# Altium PCB JTAGICE Convertor.PcbDoc
Units mm, origin at the board's own origin, x right, y up, seen from the top; angles counter-clockwise.
Board outline 41.3 x 28.3 mm, 2 copper layers (Top Layer, Bottom Layer); 6 components, 7 nets, 28 pads, 0 vias.
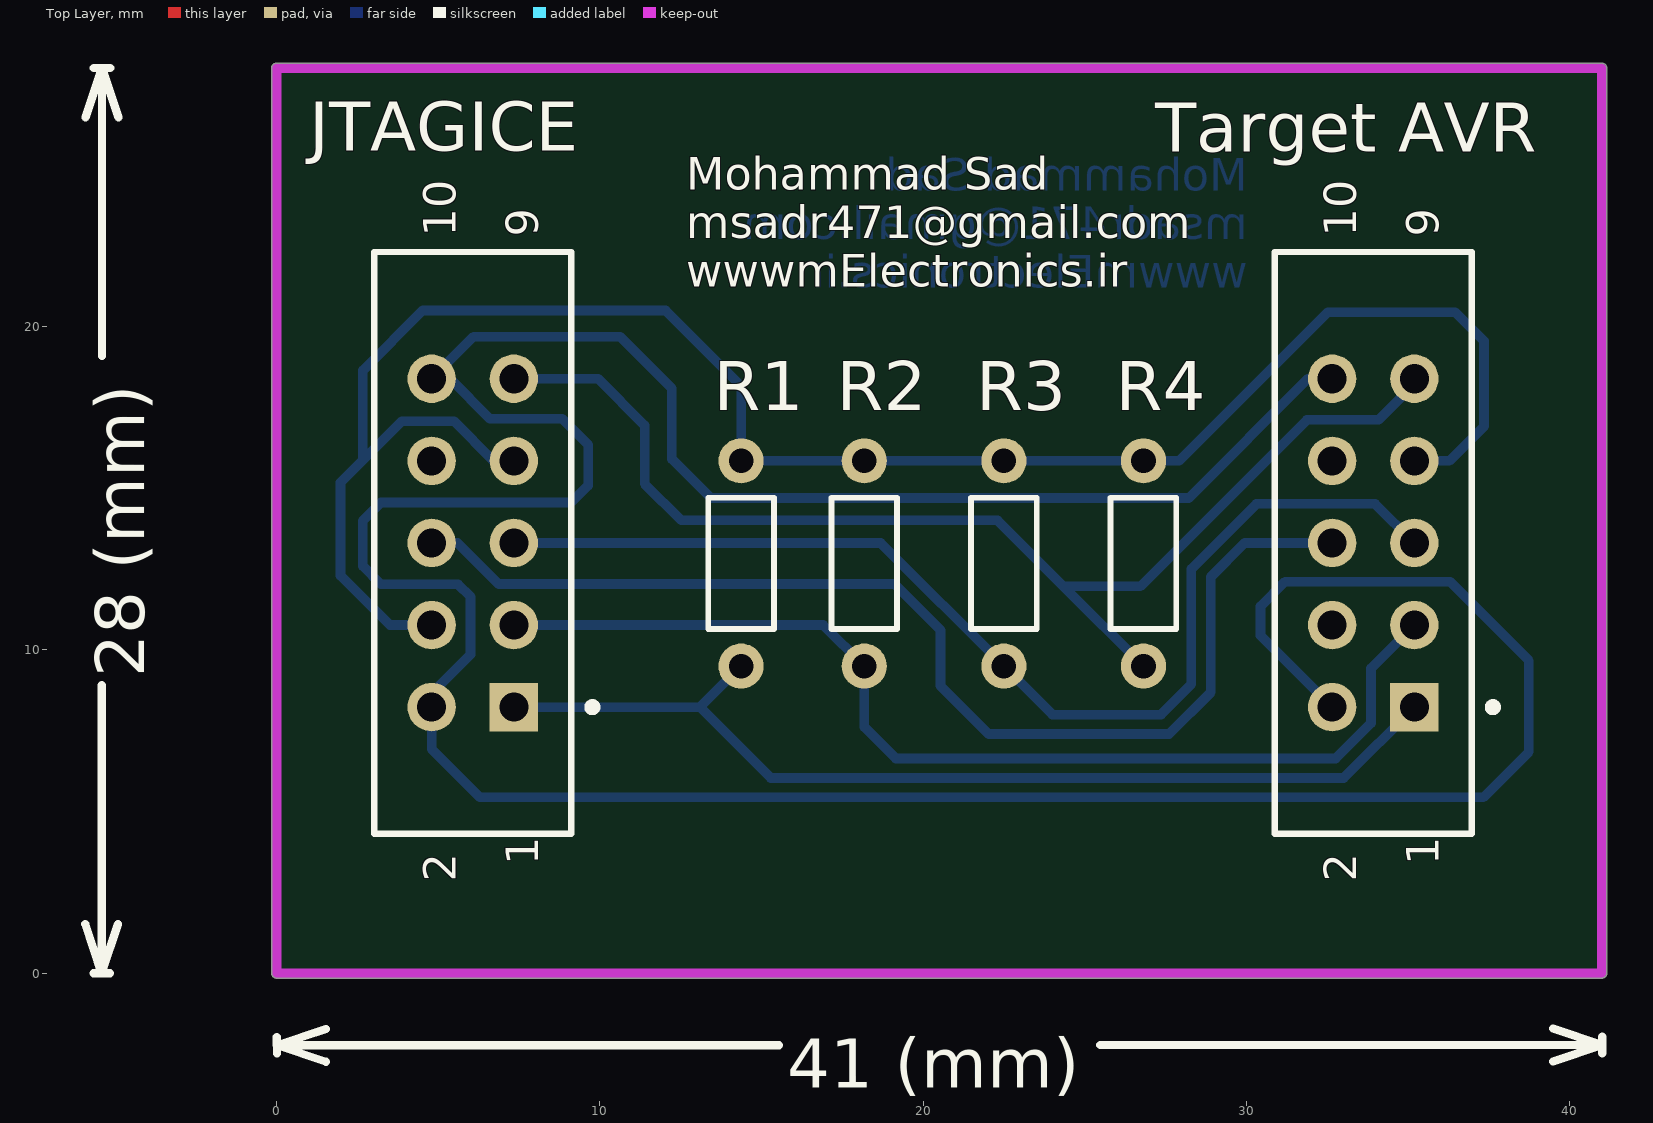
[diagram p0: Top Layer view]
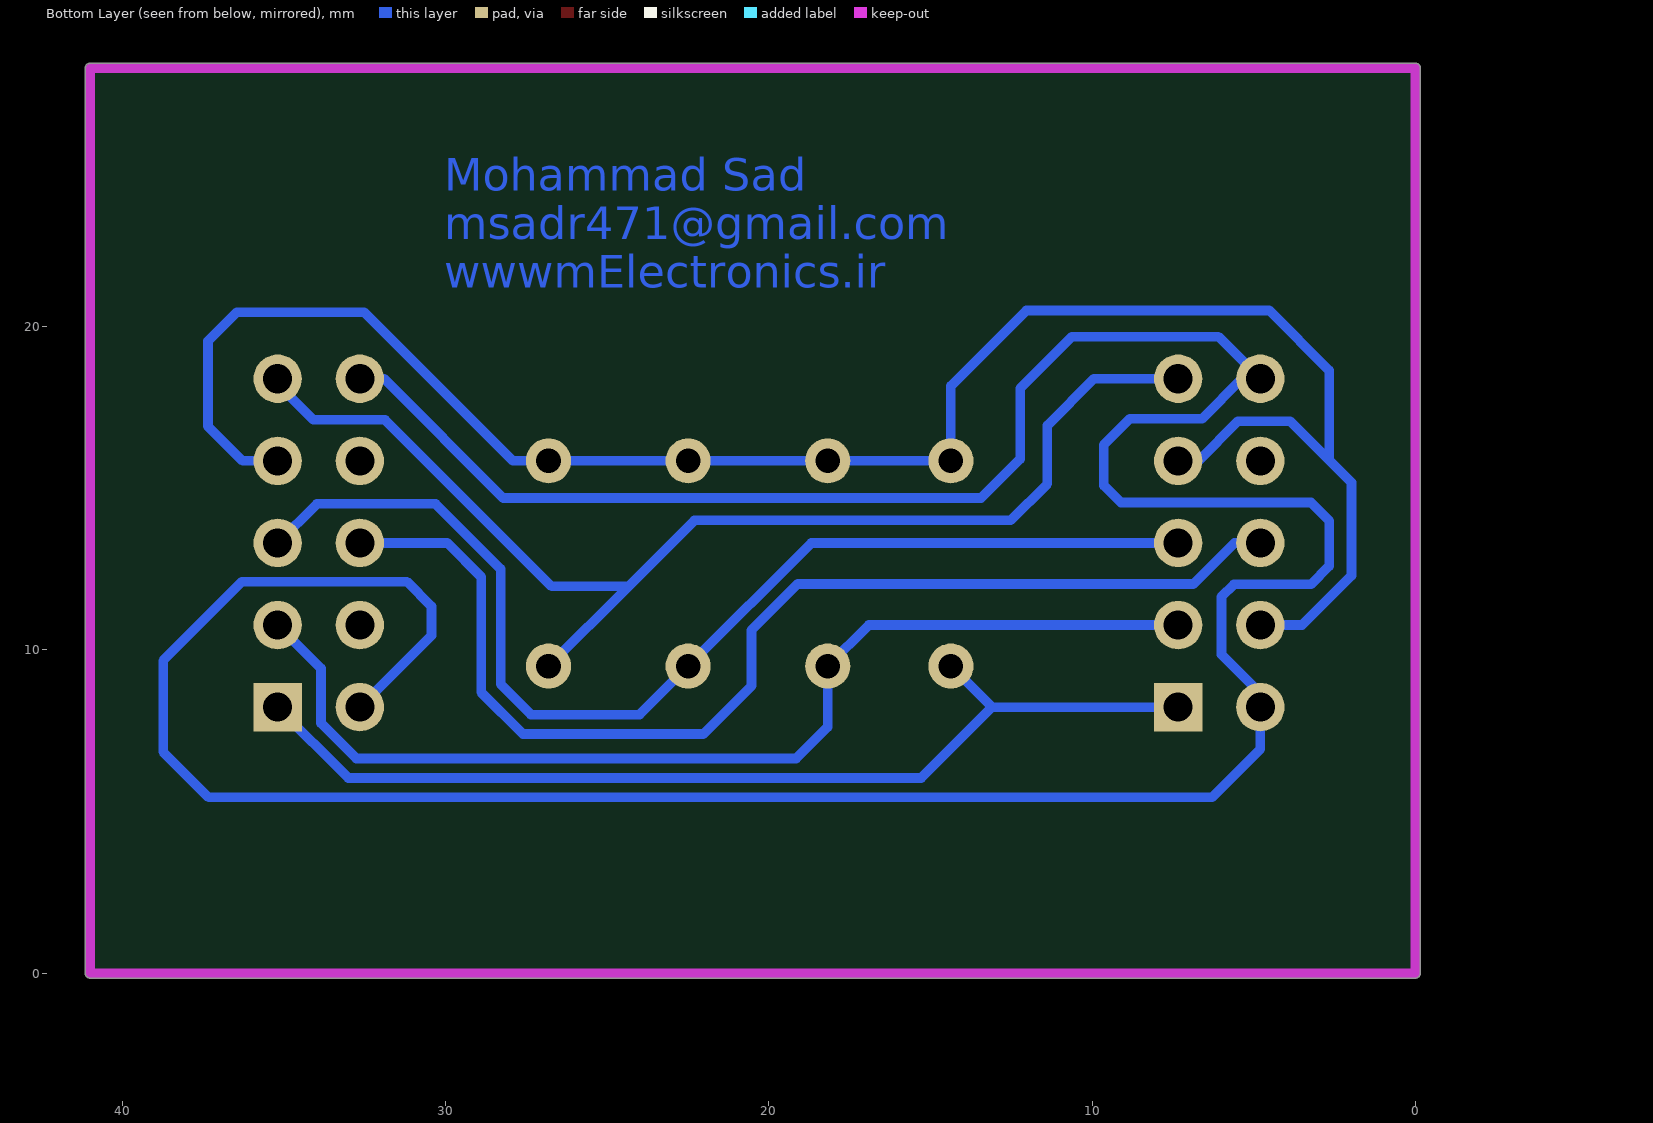
[diagram p1: Bottom Layer view, seen from below]
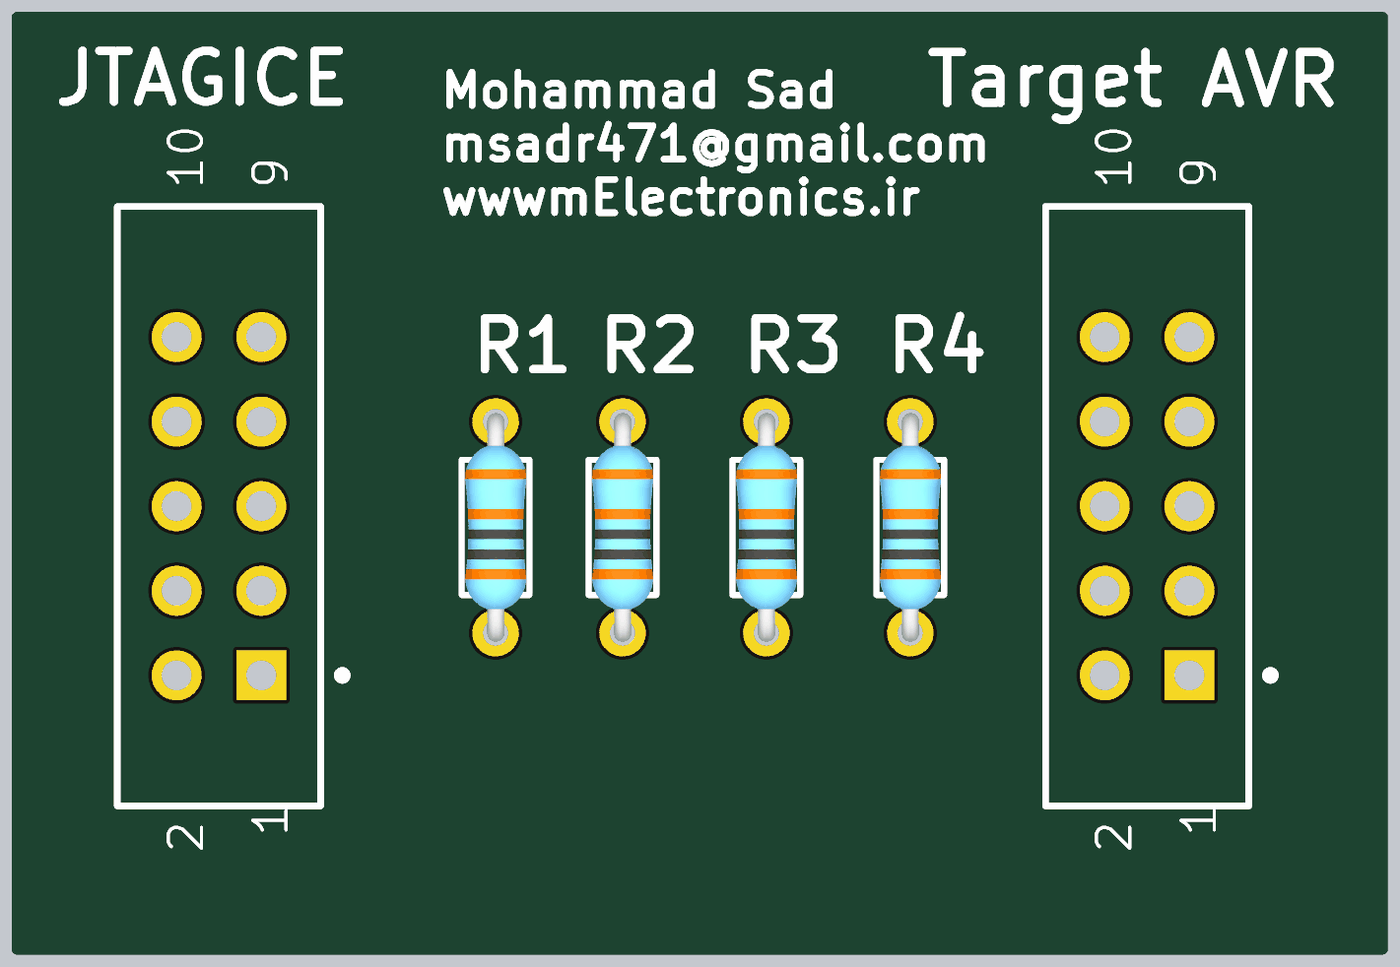
[diagram p2: 3D render of the assembled board from above, using the file's embedded part models]

## Layer stack, top to bottom
Top Solder: solder mask 0.0102, Solder Resist, Dk 3.5
Top Layer: signal copper 0.0356
Dielectric 1: dielectric 0.32, FR-4, Dk 4.8
Bottom Layer: signal copper 0.0356
Bottom Solder: solder mask 0.0102, Solder Resist, Dk 3.5

## Board outline
-0.15,0 ccw(c0,0) 0,-0.15 41,-0.15 ccw(c41,0) 41.15,0 41.15,28 ccw(c41,28) 41,28.15 0,28.15 ccw(c0,28) -0.15,28

## Design rules (kind name [scope] priority, off if disabled: settings)
Clearance [All] p1: gap=0.3 ignorepadtopadclearanceinfootprint=FALSE
PlaneConnect [All] p1: planeconnectstyle=Direct reliefexpansion=0.508 reliefentries=4 reliefconductorwidth=0.254 reliefairgap=0.254
PolygonConnect [All] p1: connectstyle=Relief reliefconductorwidth=0.4 reliefentries=4 polygonreliefangle="90 Angle" airgapwidth=0.3
RoutingVias [All] p1: holewidth=0.711 width=1.27 viastyle="Through Hole" minholewidth=0.711 minwidth=1.27 maxholewidth=0.711 maxwidth=1.27
SolderMaskExpansion [All] p1: expansion=0.102
Width [All] p1: maxlimit=0.3 minlimit=0.3 preferedwidth=0.3 minimp=50.000000 maximp=50.000000 favimp=50.000000
29 further rules are at their usual default settings.

## Components (designator, comment, footprint, x,y, rotation, side; value= is the part's Value field where it differs from the comment)
JTAGICE "IDC 5X2" 9181109621 6.07,13.311 r90 top
R1 "10K" Res-(1/4) 14.372,12.676 r90 top
R2 "10K" Res-(1/4) 18.182,12.676 r90 top
R3 "10K" Res-(1/4) 22.5,12.676 r90 top
R4 "10K" Res-(1/4) 26.818,12.676 r90 top
"Target AVR" "IDC 5X2" 9181109621 33.927,13.311 r90 top

## Footprints (in the part's own frame and the unit in brackets; to place one, negate y for a bottom-side part, rotate by r counter-clockwise, add the part's x,y. Pads: shape width x height; smd on the part's side, far side on the other; paste and mask are expansions set on the pad)
9181109621 [mm] "Connector; IDC, PCB Transition - 2 Rows, Thru-Hole; 10 Position; Vertical; Pitch 2.54 mm; Body 18.00 x 6.1 x 7.45 mm (LxWxH)"
  rect 1.5x1.5 hole 0.9: 1(-5.08,-1.27)
  round 1.5 hole 0.9: 2(-5.08,1.27) 3(-2.54,-1.27) 4(-2.54,1.27) 5(0,-1.27) 6(0,1.27) 7(2.54,-1.27) 8(2.54,1.27) 9(5.08,-1.27) 10(5.08,1.27)
  silkscreen extent -9,-3.83 9,3.05
Res-(1/4) [mil]
  round 55 hole 30: 1(-125,0) 2(125,0)
  silkscreen extent -80,-40 80,40, body extent -135,-36 135,36, height 115

## Part data
JTAGICE "Target AVR": "Header, 5-Pin, Dual row", LatestRevisionDate=17-Jul-2002, LatestRevisionNote="Re-released for DXP Platform.", Publisher="Altium Limited"
R1 R2 R3 R4: library part Resistor, "Resistor", Power="1/8 W", Tolerance=5%

## Nets (pads, with @x,y where several pads share a name; then routed paths per layer and width w, separated by ;. In a path a pad name is that pad's centre, name@x,y a point inside that pad or via, vN(x,y) a via of type N, cw(c..) or ccw(c..) an arc to the next point about the centre after c; other vN are vias at no path point)
GND: "Target AVR.2" "Target AVR.10" JTAGICE.2 JTAGICE.10 | length 110.1
  Bottom Layer w0.3: 32.657,8.231 30.44,10.448 30.44,11.35 31.201,12.111 36.299,12.111 38.74,9.67 38.74,6.85 37.33,5.44 6.29,5.44 4.8,6.93 JTAGICE.2 4.8,8.66 6,9.86 6,11.65 5.62,12.03 3.23,12.03 2.67,12.59 2.67,14 3.23,14.56 9.11,14.56 9.64,15.09 9.64,16.35 8.84,17.15 6.6,17.15 5.359,18.391 JTAGICE.10 6.099,19.69 10.63,19.69 12.23,18.09 12.23,15.91 13.44,14.7 28.22,14.7 31.911,18.391 32.657,18.391 32.657,18.917
RESET: "Target AVR.6" JTAGICE.6 | length 35.9
  Bottom Layer w0.3: JTAGICE.6 5.599,13.311 6.87,12.04 19.112,12.04 20.54,10.612 20.54,8.89 22.03,7.4 27.609,7.4 28.9,8.691 28.9,12.261 29.95,13.311 32.657,13.311
TCK: "Target AVR.1" JTAGICE.1 R1.1 | length 31.5
  Bottom Layer w0.3: JTAGICE.1 13.102,8.231 ; R1.1 13.102,8.231 ; 35.197,8.231 35.197,8.225 33.012,6.04 15.293,6.04 13.102,8.231
TDI: "Target AVR.9" JTAGICE.9 R4.1 | length 38
  Bottom Layer w0.3: JTAGICE.9 9.949,18.391 11.39,16.95 11.39,15.14 12.52,14.01 22.309,14.01 24.348,11.971 ; R4.1 24.348,11.971 ; 35.197,18.391 35.197,18.007 35.084,17.894 34.864,17.894 34.09,17.12 31.87,17.12 26.721,11.971 24.348,11.971
TDO: "Target AVR.3" JTAGICE.3 R2.1 | length 33.4
  Bottom Layer w0.3: JTAGICE.3 16.912,10.771 R2.1 18.182,7.618 19.16,6.64 32.763,6.64 33.857,7.734 33.857,9.431 35.197,10.771
TMS: "Target AVR.5" JTAGICE.5 R3.1 | length 35.3
  Bottom Layer w0.3: JTAGICE.5 18.69,13.311 R3.1 24.001,8 27.36,8 28.3,8.94 28.3,12.51 30.31,14.52 33.988,14.52 35.197,13.311
VCC: "Target AVR.7" JTAGICE.4 JTAGICE.7 R1.2 R2.2 R3.2 R4.2 | length 62
  Bottom Layer w0.3: JTAGICE.4 3.509,10.771 1.98,12.3 1.98,15.18 2.67,15.87 ; JTAGICE.7 6.719,15.851 5.49,17.08 3.88,17.08 2.67,15.87 ; 35.197,15.851 36.281,15.851 37.35,16.92 37.35,19.56 36.46,20.45 32.524,20.45 27.925,15.851 R4.2 R3.2 R2.2 R1.2 14.372,18.168 12.04,20.5 4.52,20.5 2.67,18.65 2.67,15.87
pads on no net: "Target AVR.4" "Target AVR.8" JTAGICE.8

## Keep-outs
Keep-Out Layer:
  lines w0.3: 0,0 0,28 41,28 41,0 0,0

## Other copper
Bottom Layer:
  text "Mohammad Sad / msadr471@gmail.com / wwwmElectronics.ir" at 30.04,21.21 h1

## Silkscreen, mask and mechanical layers (free items; w line width, h text height)
Top Overlay:
  lines w0.254: -5.917,1.524 -5.41,0 ; -5.909,26.476 -5.4,28 ; -5.664,0 -5.156,0 ; -5.654,28 -5.146,28 ; -5.407,8.91 -5.41,0 ; -5.403,19.09 -5.4,28 ; -4.901,1.524 -5.41,0 ; -4.893,26.476 -5.4,28 ; 0.01,-2.484 0.01,-1.976 ; 1.534,-2.738 0.01,-2.23 ; 1.534,-1.722 0.01,-2.23 ; 15.54,-2.226 0.01,-2.23 ; 25.48,-2.224 41.01,-2.22 ; 39.486,-2.728 41.01,-2.22 ; 39.486,-1.712 41.01,-2.22 ; 41.01,-2.474 41.01,-1.966
  text "Mohammad Sad / msadr471@gmail.com / wwwmElectronics.ir" at 12.68,21.24 h1
  text "28 (mm)" at -4.093,9.164 h1.52 r89.98
  text "41 (mm)" at 15.794,-3.539 h1.52 r0.01

## Text inside footprints (layer, text, board x,y; h text height)
JTAGICE: Top Overlay "2" at 5.55,2.836 h1 r90; Top Overlay "1" at 8.09,3.336 h1 r90; Top Overlay "10" at 5.55,22.786 h1 r90; Top Overlay "9" at 8.09,22.786 h1 r90
"Target AVR": Top Overlay "2" at 33.407,2.836 h1 r90; Top Overlay "1" at 35.947,3.336 h1 r90; Top Overlay "10" at 33.407,22.786 h1 r90; Top Overlay "9" at 35.947,22.786 h1 r90